# Altium PCB B218.PcbDoc
Units mm, origin at the board's own origin, x right, y up, seen from the top; angles counter-clockwise.
Board outline 40 x 22 mm, 4 copper layers (Top Copper, Signal Layer 1, Signal Layer 2, Bottom Copper), stack 1.57 mm thick; 18 components, 21 nets, 115 pads, 224 vias.
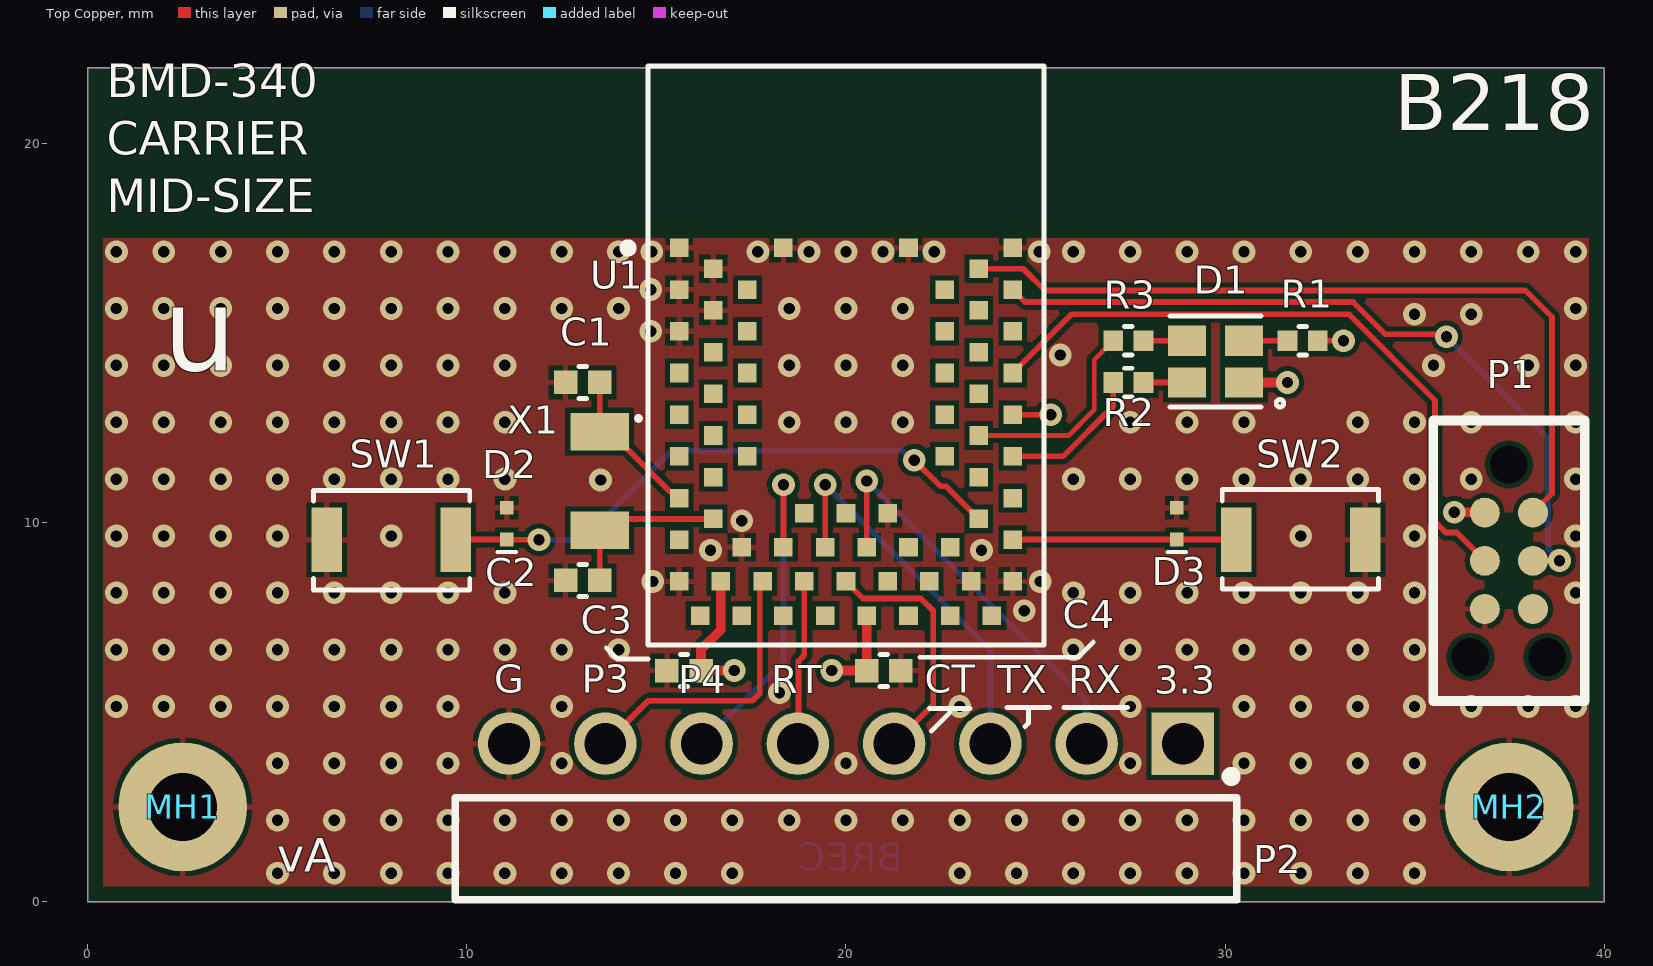
[diagram p0: Top Copper view]
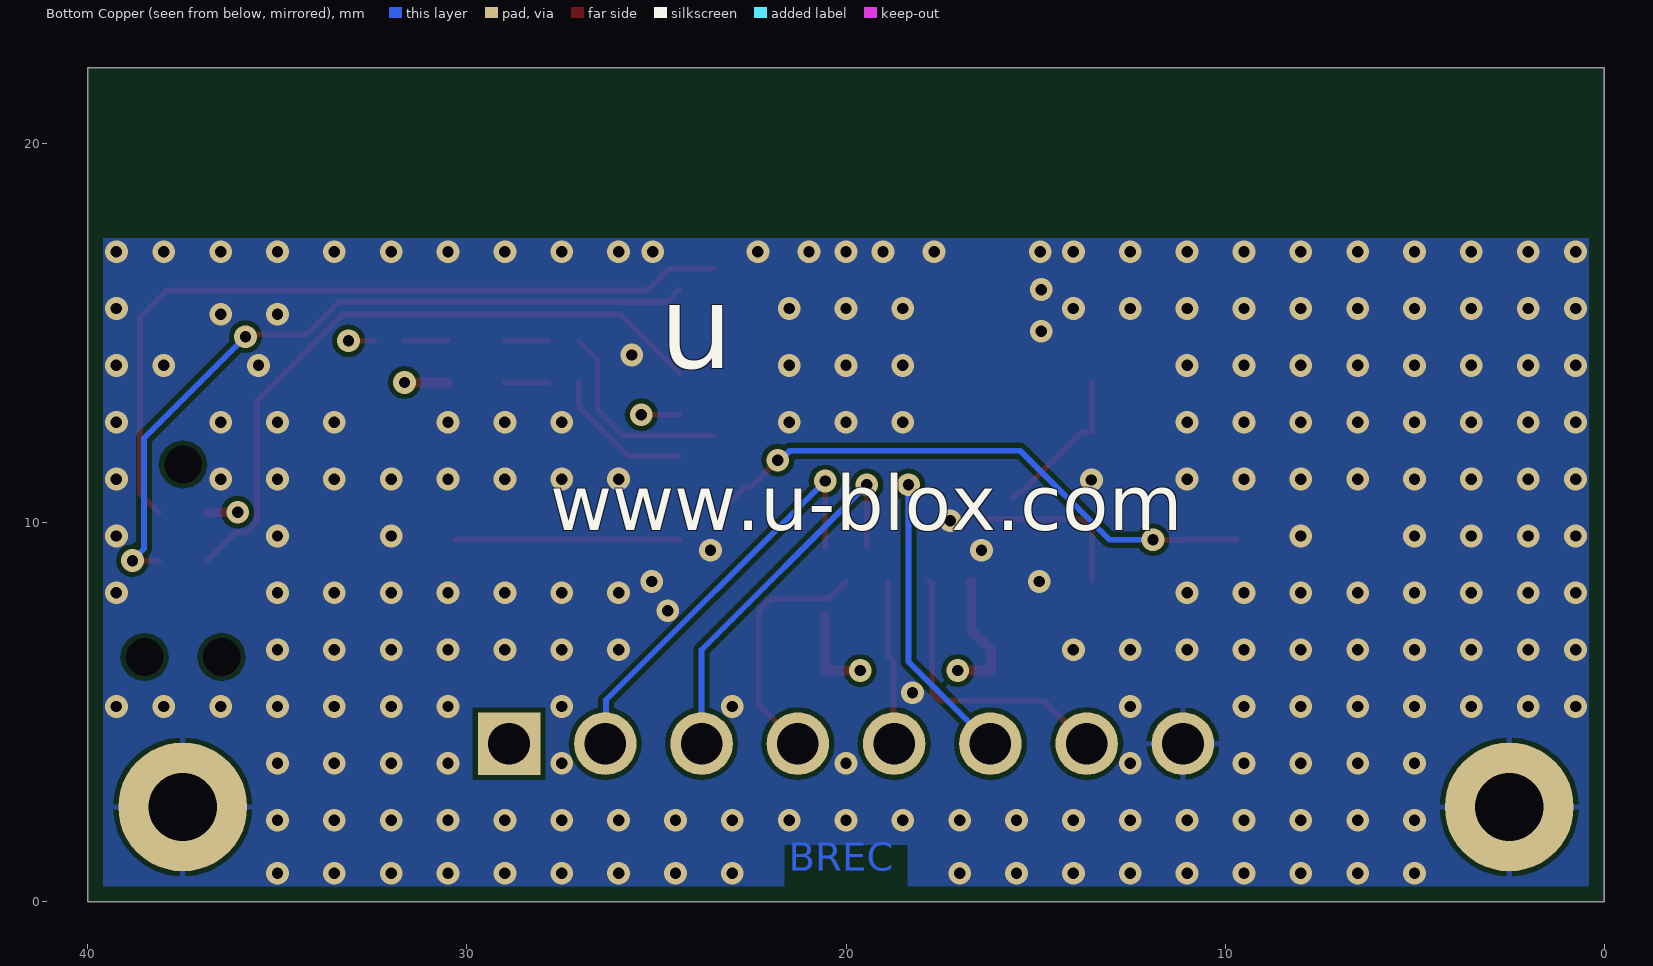
[diagram p1: Bottom Copper view, seen from below]
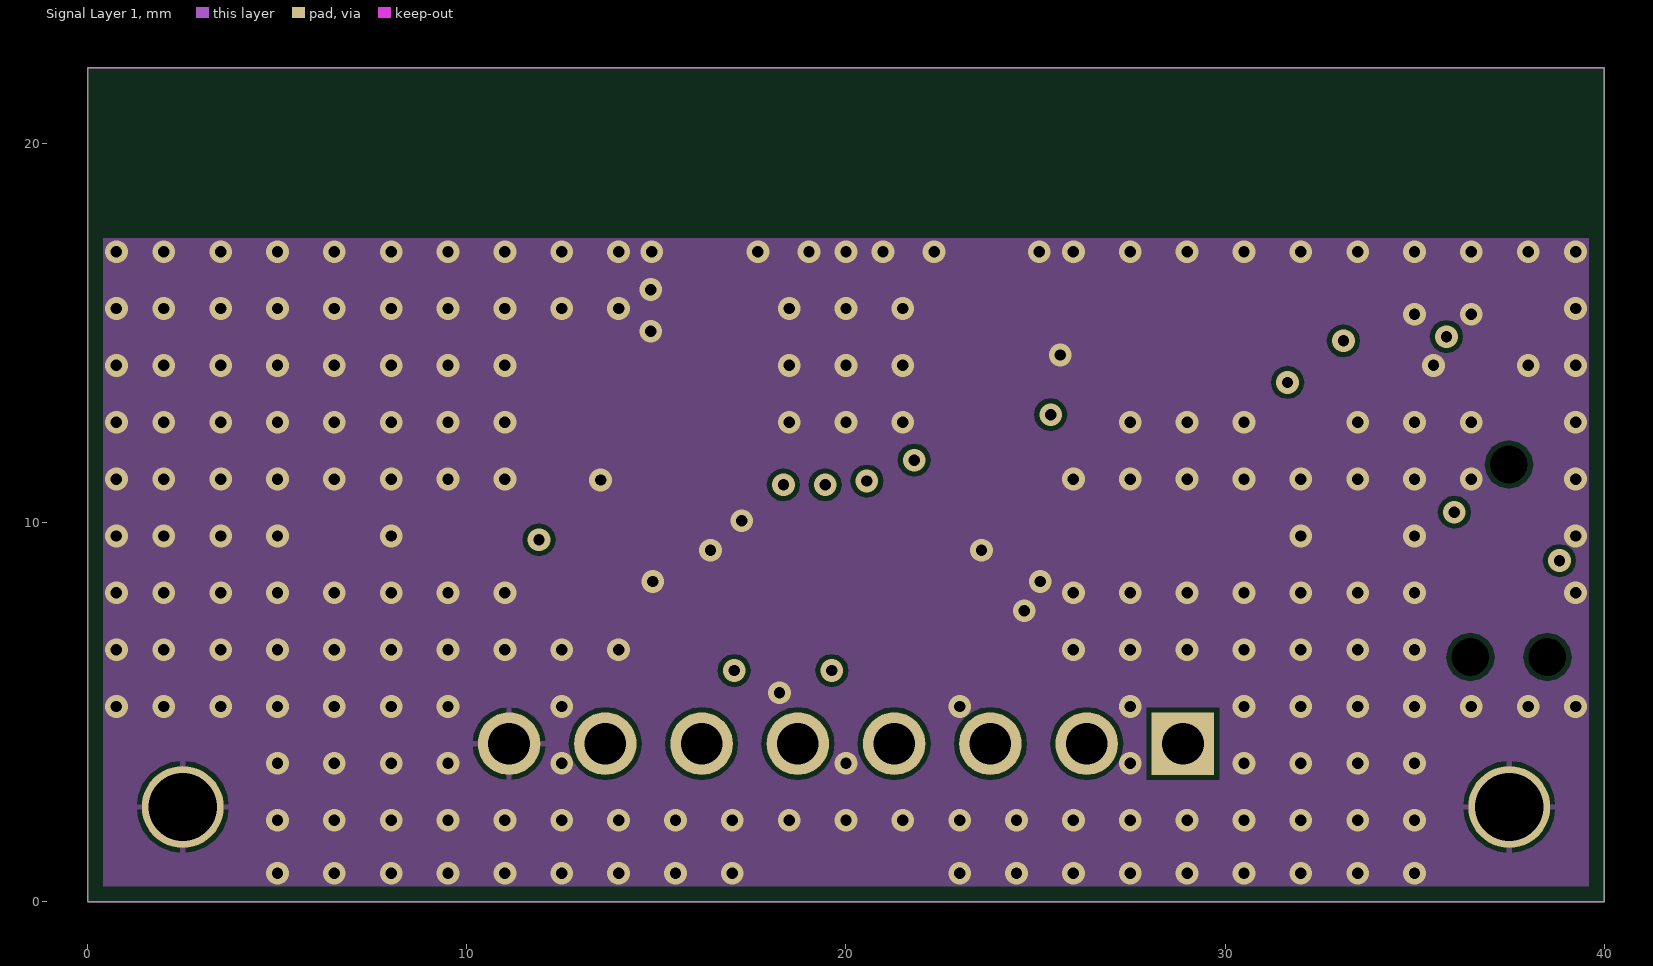
[diagram p2: Signal Layer 1]
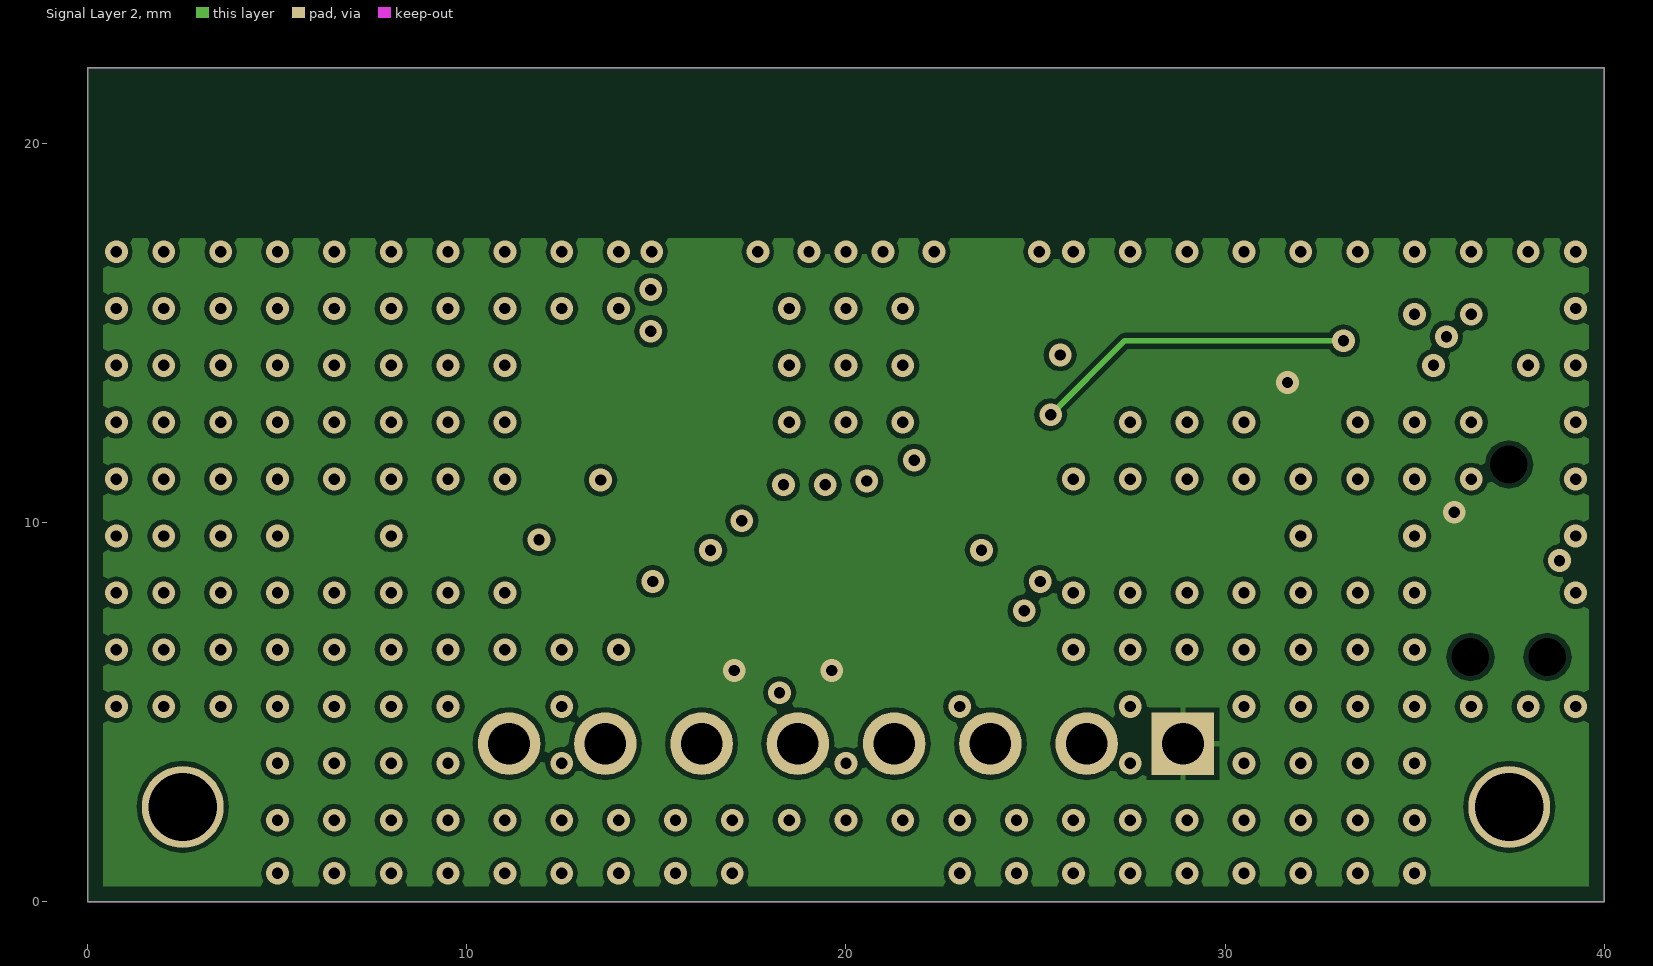
[diagram p3: Signal Layer 2]

## Layer stack, top to bottom
Top Mask: solder mask 0.015, Solder Resist, Dk 3.8
Top Copper: signal copper 0.035
Dielectric 1: prepreg 0.1, 2313, Dk 4.05
Signal Layer 1: signal copper 0.0175
Core: core 1.265, FR-4, Dk 4.5
Signal Layer 2: signal copper 0.0175
Dielectric 2: prepreg 0.1, 2313, Dk 4.05
Bottom Copper: signal copper 0.035
Bottom Mask: solder mask 0.015, Solder Resist, Dk 3.8

## Board outline
0,22 40,22 40,0 0,0

## Design rules (kind name [scope] priority, off if disabled: settings)
BoardOutlineClearance [All] p1: gap=0.4 ignorepadtopadclearanceinfootprint=FALSE
Clearance "Stitching GND" [IsStitchingVia and InNet('GND') vs (IsVia and (Not IsStitchingVia)) Or IsPad] p1: gap=0.127 ignorepadtopadclearanceinfootprint=TRUE
Clearance Clearance_Poly [InPolygon vs OnLayer('Keep-Out Layer') OR (OnLayer('Multi-Layer') AND IsPad  AND Not(PadIsPlated))] p2: gap=0.127 ignorepadtopadclearanceinfootprint=TRUE
Clearance [All] p3: gap=0.127 ignorepadtopadclearanceinfootprint=FALSE except(0: Arc-Text Arc-Hole Track-Text Track-Hole SMDPad-Text SMDPad-Hole THPad-Text THPad-Hole Via-Text Via-Hole Fill-Text Fill-Hole Poly-Text Poly-Hole Region-Text Region-Hole Text-Text Text-Hole)
ComponentClearance [All] p1: gap=0.127 collisioncheckmode=3 verticalgap=0.254 showdistances=FALSE
DiffPairsRouting .14 [All] p1: maxlimit=0.254 minlimit=0.1 mostfreqgap=0.254 toplayer_maxgap=0.1 toplayer_prefgap=0.1 toplayer_minwidth=0.1 toplayer_maxwidth=0.1 toplayer_prefwidth=0.1 midlayer1_mingap=0.254 midlayer1_minwidth=0.381 midlayer1_maxwidth=0.381 midlayer1_prefwidth=0.381 midlayer2_mingap=0.254 midlayer2_minwidth=0.381 midlayer2_maxwidth=0.381 midlayer2_prefwidth=0.381 bottomlayer_maxgap=0.1 bottomlayer_prefgap=0.1 bottomlayer_minwidth=0.1 bottomlayer_maxwidth=0.1 bottomlayer_prefwidth=0.1 maxuncoupledlength=12.7
Height [All] p1: minheight=0 maxheight=25.4 prefheight=2.54
HoleSize [All] p1: absolutevalues=TRUE maxlimit=2540 minlimit=0.127 maxpercent=80.000 minpercent=20.000
HoleToHoleClearance [All] p1: gap=0.152 allowstackedmicrovias=TRUE
MinimumSolderMaskSliver [All] p1: minsoldermaskwidth=0.025
PlaneClearance [InPoly] p1: clearance=0.254
PlaneConnect [All] p1: pad.planeconnectstyle=Relief pad.reliefexpansion=0.508 pad.reliefentries=4 pad.reliefconductorwidth=0.254 pad.reliefairgap=0.254 via.planeconnectstyle=Direct via.reliefexpansion=0.508 via.reliefentries=4 via.reliefconductorwidth=0.254 via.reliefairgap=0.254
PolygonConnect ThermalVias [IsVia] p1: connectstyle=Direct reliefconductorwidth=0.254 reliefentries=4 polygonreliefangle="90 Angle" airgapwidth=0.254
PolygonConnect "PolygonConnect - Power" [InNetClass('')] p2: connectstyle=Relief reliefconductorwidth=0.254 reliefentries=4 polygonreliefangle="90 Angle" airgapwidth=0.127
PolygonConnect PolygonConnect-BGA [InComponentClass('')] p3: connectstyle=Relief reliefconductorwidth=0.152 reliefentries=4 polygonreliefangle="45 Angle" airgapwidth=0.152
PolygonConnect PolygonConnect-General [All] p4: connectstyle=Relief reliefconductorwidth=0.152 reliefentries=4 polygonreliefangle="90 Angle" airgapwidth=0.127
RoutingLayers [All] p1: top layer_v5=TRUE mid layer 1_v5=FALSE mid layer 2_v5=TRUE bottom layer_v5=TRUE
RoutingVias [All] p1: holewidth=0.3 width=0.6 viastyle="Through Hole" minholewidth=0.2 minwidth=0.5 maxholewidth=7 maxwidth=1
SMDEntry [All] p1 off: side=TRUE corner=TRUE anyangle=TRUE
SilkToBoardRegionClearance [All] p1 off:
SilkToSilkClearance [All] p1 off: silktosilkclearance=0.025
SilkToSolderMaskClearance [IsPad] p1 off: minsilkscreentomaskgap=0 clearancetoexposedcopper=TRUE
SolderMaskExpansion SolderMaskExpansion_via [IsVia] p1: expansion=-0.254 istentingtop=TRUE
SolderMaskExpansion [All] p2: expansion=0.05 istentingtop=FALSE
UnRoutedNet [All] p1: checkbadconnections=TRUE
ViasUnderSMD [All] p1: allowed=FALSE
Width [All] p1: maxlimit=2.54 minlimit=0.127 preferedwidth=0.152 toplayer_maxwidth=0.254 toplayer_prefwidth=0.152 bottomlayer_maxwidth=0.254 bottomlayer_prefwidth=0.152 minimp=50.000000 maximp=50.000000 favimp=50.000000
Width Width_1 [All] p2: maxlimit=0.254 minlimit=0.254 preferedwidth=0.254
17 further rules are at their usual default settings.

## Components (designator, comment, footprint, x,y, rotation, side; value= is the part's Value field where it differs from the comment)
C1 "UBXH01-000411410P" "Cap 0402" 13.05,13.7 r180 top value=10P
C2 "UBXH01-000411410P" "Cap 0402" 13.05,8.475 r180 top value=10P
C3 "UBXH01-2021002100N" "Cap 0402" 15.725,6.1 r180 top value=100N
C4 "UBXH01-2021002100N" "Cap 0402" 21,6.1 r0 top value=100N
D1 "115-00011" 4-PLCC 29.75,14.25 r0 top
D2 "110-00019" SOD-923 11.05,9.975 r90 top
D3 "110-00019" SOD-923 28.725,9.975 r90 top
MH1 "MH_M1.5DNP" MH_M1.5 2.5,2.5 r0 top
MH2 "MH_M1.5DNP" MH_M1.5 37.5,2.5 r0 top
P1 "TC2030-IDC-NLDNP" TC2030-IDC-NL 37.49,11.535 r270 top
P2 "61300811021" 61300811021 20,1.4 r0 top
R1 "180-00031499R" "RES 0402 HD" 32.05,14.8 r180 top value=499R
R2 "180-00098220R" "RES 0402 HD" 27.45,13.7 r0 top value=220R
R3 "180-00098220R" "RES 0402 HD" 27.45,14.8 r0 top value=220R
SW1 "135-00007" B3U-1000P 8,9.55 r180 top
SW2 "135-00007" B3U-1000P 32,9.55 r0 top
U1 "=Value" BMD_LGA68S_1500X1020X190_PCB 20,14.4 r0 top
X1 "100-00005" XTAL_3215 13.5,11.1 r270 top

## Footprints (in the part's own frame and the unit in brackets; to place one, negate y for a bottom-side part, rotate by r counter-clockwise, add the part's x,y. Pads: shape width x height; smd on the part's side, far side on the other; paste and mask are expansions set on the pad)
4-PLCC [mm] "4 Pin Plastic Leaded Chip Carrier, 2mm x 2mm"
  rect 1x0.8 smd: 1(0.75,-0.55) 2(-0.75,-0.55) 3(-0.75,0.55) 4(0.75,0.55)
  silkscreen extent -1.2,-1.2 1.8,1.2, body extent -1.05,-1.05 1.05,1.05, height 1.01
61300811021 [mm]
  rect 1.65x1.65 hole 1.1: 1(8.89,2.77)
  round 1.65 hole 1.1: 2(6.35,2.77) 3(3.81,2.77) 4(1.27,2.77) 5(-1.27,2.77) 6(-3.81,2.77) 7(-6.35,2.77) 8(-8.89,2.77)
  silkscreen extent -10.31,-1.35 10.31,2.03, body extent -10.16,-7.27 10.16,3.09, height 2.58
B3U-1000P [mm] "Button Tactile, SMT 4mm x 2.5mm, height 1.2mm"
  rect 0.8x1.7 smd: 1(-1.7,0) 2(1.7,0)
  silkscreen extent -2.07,-1.3 2.05,1.33, body extent -2,-1.25 2,1.25, height 1.6
BMD_LGA68S_1500X1020X190_PCB [mm] "LGA, 68pin, 1.1mm Pitch, 15mm x 10.2mm"
  rect 0.49x0.49 smd: 1(-4.4,2.85) 2(-3.5,2.3) 3(-4.4,1.75) 4(-3.5,1.2) 5(-4.4,0.65) 6(-3.5,0.1) 7(-4.4,-0.45) 8(-3.5,-1) 9(-4.4,-1.55) 10(-3.5,-2.1) 11(-4.4,-2.65) 12(-3.5,-3.2) 13(-4.4,-3.75) 14(-3.5,-4.3) 15(-4.4,-4.85) 16(-4.4,-5.95) 17(-3.3,-5.95) 18(-2.75,-5.05) 19(-2.2,-5.95) 20(-1.65,-5.05) 21(-1.1,-5.95) 22(-0.55,-5.05) 23(0,-5.95) 24(0.55,-5.05) 25(1.1,-5.95) 26(1.65,-5.05) 27(2.2,-5.95) 28(2.75,-5.05) 29(3.3,-5.95) 30(4.4,-5.95) 31(4.4,-4.85) 32(3.5,-4.3) 33(4.4,-3.75) 34(3.5,-3.2) 35(4.4,-2.65) 36(3.5,-2.1) 37(4.4,-1.55) 38(3.5,-1) 39(4.4,-0.45) 40(3.5,0.1) 41(4.4,0.65) 42(3.5,1.2) 43(4.4,1.75) 44(3.5,2.3) 45(4.4,2.85) 46(1.65,2.85) 47(-1.65,2.85) 48(-2.6,1.75) 49(-2.6,0.65) 50(-2.6,-0.45) 51(-2.6,-1.55) 52(-2.6,-2.65) 53(-1.1,-4.15) 54(0,-4.15) 55(1.1,-4.15) 56(2.6,-2.65) 57(2.6,-1.55) 58(2.6,-0.45) 59(2.6,0.65) 60(2.6,1.75) 61(-3.85,-6.85) 62(-2.75,-6.85) 63(-1.65,-6.85) 64(-0.55,-6.85) 65(0.55,-6.85) 66(1.65,-6.85) 67(2.75,-6.85) 68(3.85,-6.85)
  Multi-Layer pour cut-out: -5.1,3.1 5.1,3.1 5.1,7.5 -5.1,7.5
  silkscreen extent -5.85,-7.63 5.23,7.65, body extent -5.1,-7.5 5.1,7.5, height 1.87
"Cap 0402" [mm] "Chip Capacitor, 2-Leads, Body 1.00x0.50mm, IPC Medium Density"
  rect 0.62x0.62 smd: 1(-0.45,0) 2(0.45,0)
  silkscreen extent -0.1,-0.43 0.1,0.43, body extent -0.55,-0.3 0.55,0.3, height 0.6
MH_M1.5 [mm] "Mounting Hole M1.5 Metric, 3.4mm diameter pad"
  round 3.4 / inner round 2.159 / far side round 3.4 hole 1.8: 1(0,0)
"RES 0402 HD" [mm] "Chip Resistor, 2-Leads, Body 1.05x0.54mm, IPC High Density"
  rect 0.52x0.55 smd: 1(-0.4,0) 2(0.4,0)
  silkscreen extent -0.1,-0.38 0.1,0.38, body extent -0.55,-0.3 0.55,0.3, height 0.4
SOD-923 [mm] "SOD-923, 2-Leads, Body 1.25x2.50mm, IPC High Density,"
  rect 0.36x0.35 smd mask+0.05: 1(-0.42,0) 2(0.42,0)
  silkscreen extent -0.75,-0.25 -0.75,0.25, body extent -0.4,-0.3 0.4,0.3, height 0.4
TC2030-IDC-NL [mm] "Tag-Connect 6-Pin No Legs"
  round 0.9 hole 0.995 unplated: 0(0,0) 0(5.08,-1.016) 0(5.08,1.016)
  round 0.79 smd paste-0.39: 1(1.27,-0.635) 2(1.27,0.635) 3(2.54,-0.635) 4(2.54,0.635) 5(3.81,-0.635) 6(3.81,0.635)
  silkscreen extent -1.16,-2 6.24,2
XTAL_3215 [mm] "XTAL, 2-Leads, Body 1.50x3.20mm"
  rect 1x1.55 smd: 1(-1.3,0) 2(1.3,0)
  silkscreen extent -1.7,0.98 -1.6,1.07, body extent -1.65,-0.8 1.65,0.8, height 0.9

## Part data
C1 C2: library part UBXH01-0004114, "CAP CER COG 0402", Manufacturer="Murata Manufacturing Company, Ltd.", Manufacturer 2=None, Manufacturer P/N=GRM1555C1H100CZ01, Max Voltage=25.0V, Tolerance=5%, Automotive=None, Critical=None, Editor=martin.frauchiger, Env=ROHS, Manufacturer 3=None, Manufacturer P/N 2=None, Manufacturer P/N 3=None, Max Current=None, Max Operating Temp=None, Max Power=None, Mfg P/N Datasheet=None, Mfg P/N Datasheet 2=None, Mfg P/N Datasheet 3=None, Mfg P/N Released=Yes, Mfg P/N Released 2=None, Mfg P/N Released 3=None, Mfg P/N Split=0, Mfg P/N Split 2=None, Mfg P/N Split 3=None, Mfg P/N Status=Obsolete, Mfg P/N Status 2=None, Mfg P/N Status 3=None, Min Operating Temp=None, Part Number=UBXH01-0004114, Part Type=Capacitor, Perferred=PREF, Permitted Use="Volume Products", RefDes=C, Release Data="2005-09-01 15:36:53", Released by=martin.frauchiger, Single Source=None, Size=0x0y, UBX Wiki=https://wiki.u-blox.com/bin/view/Operations/PartDetails?index=5225
C3 C4: library part UBXH01-2021002, "CAP CER X5R 0402", Manufacturer="Samsung Electro-Mechanics", Manufacturer 2=None, Manufacturer P/N=CL05A104KP5NNN, Max Voltage=10.0V, Tolerance=10%, Automotive=None, Critical=None, Editor=roland.rust, Env=GREEN, Manufacturer 3=None, Manufacturer P/N 2=None, Manufacturer P/N 3=None, Max Current=None, Max Operating Temp=None, Max Power=None, Mfg P/N Datasheet=https://wiki.u-blox.com/bin/view/Generic/Docs/DocumentSummary?index=28113, Mfg P/N Datasheet 2=None, Mfg P/N Datasheet 3=None, Mfg P/N Released=Yes, Mfg P/N Released 2=None, Mfg P/N Released 3=None, Mfg P/N Split=0, Mfg P/N Split 2=None, Mfg P/N Split 3=None, Mfg P/N Status=Active, Mfg P/N Status 2=None, Mfg P/N Status 3=None, Min Operating Temp=None, Part Number=UBXH01-2021002, Part Type=Capacitor, Perferred=PREF, Permitted Use="Volume Products", RefDes=C, Release Data="2005-07-22 13:59:44", Released by=roland.rust, Single Source=None, Size=0x0y, UBX Wiki=https://wiki.u-blox.com/bin/view/Operations/PartDetails?index=5759
D1: "LED, RGB Diffused SMT, PLCC4 4 Pin", Color=RGB, Current="20mA Red, 10mA Green, 10mA, Blue", Manufacturer="Cree, Inc.", Manufacturer P/N=CLMVB-FKA-CFHEHLCBB7a363, MFG Package=PLCC4, Package Type=Custom, Part Name="LED RGB SMT 2mm x 2mm", Supplier Part Number 1=941-CLMVBFKACFHEHLCB, Voltage=5V, Arena Link=https://app.bom.com/a/UCV39GZGZIHY581D?v=spec.summary, Body Size="2.0mm x 2.0mm", Component Mounting Type=SMT, Height=1mm, Item_Phase=Production, Mounting Type=Vertical, Number of Circuits=3, Part Number=115-00011, Part_Type=LED, Pins=4, Revision=0A, Supplier 1=Mouser, Use in new designs=Yes, Vf="2V Red, 3V Green, 3V Blue"
D2 D3: "Diode, ESD9B, 3.3V, ST5G, SOD-923", Manufacturer="ON Semiconductor", Manufacturer P/N=ESD9B3.3ST5G, MFG Package=SOD-923, Package Type=SOD, Part Name="Diode TVS 3.3V SOD-923", Voltage=3.3V, Arena Link=https://app.bom.com/a/4M5DJQ9Q9SR7DV4H?v=spec.summary, Body Size="0.8mm x 0.6mm", Component Mounting Type=SMT, Diode Type=TVS, Height=0.4mm, Item_Phase=Production, Part Number=110-00019, Part_Type=Diode, Pins=2, Revision=0A, Supplier 1=Arrow, Supplier Part Number 1=ESD9B3.3ST5G, Use in new designs=Yes
MH1 MH2: library part MH_M1.5, "1.5M screw mounting hole, plated", Added By="Jeremy D", Added Date=7/9/2015, DNP=DNP, Height=0mm, Part Number=MH_M1.5, Size="3.4mm x 3.4mm", Type="Mounting Hole"
P1: library part TC2030-IDC-NL, "CON PADS FOR CBL PLUG-OF-NAILS 6-PIN NO LEGS", Manufacturer="TAG Connect", Added By="Paul B", Added Date=4/22/2015, DNP=DNP, Height=0, Manufacturer P/N=TC2030-IDC-NL, Part Number=TC2030-IDC-NL, Size="6.731mm x 12.446mm"
P2: library part CMP-1502-01075-1, "THT Angled Pin Header WR-PHD, Pitch 2.54 mm, Single Row, 8 pins", Contact Resistance=20mOhm, Manufacturer="Wurth Electronics", Operating Temperature=-40to105degC, Rated Current=3A, Withstanding Voltage=500VAC, Working Voltage=250VAC, Datasheet URL=https://katalog.we-online.de/em/datasheet/6130xx11021.pdf, Gender=Male, Manufacturer Part Number=61300811021, Manufacturer URL=http://www.we-online.de, Mounting Technology=THT, Orientation=Angled, Package Reference=61300811021, Packaging=Bag, Part Number=61300811021, Pin Number=8, Pitch=2.54mm, Publisher=WurthElektronik, Row Number=Single
R1: library part 180-00031, "Resistor, 499ohm, 1%, 1/16W, 0402", Manufacturer="Rohm Semiconductor", Manufacturer 2="Samsung Electro-Mechanics America, Inc", Manufacturer P/N=MCR01MRTF4990, Manufacturer P/N 2=RC1005F4990CS, Part Name="RES SMD 499 OHM 1% 1/16W 0402", Power=1/16W, Supplier Part Number 1=RHM499CDCT-ND, Tolerance="+/- 1%", Alternate Footprint Ref="RES 0402", Arena Link=https://app.bom.com/a/Q8RZ5CVCVEDU1SS5?v=spec.summary, Component Mounting Type=SMT, Height=0.4mm, Item_Phase=Production, Part Number=180-00031, Part_Type=Resistor, Pins=2, Revision=0D, Size=0402, Supplier 1=Digi-Key, Supplier 2=Digi-Key, Supplier Part Number 2=1276-3992-1-ND, Use in new designs=Yes
R2 R3: library part 180-00098, "Resistor, 220ohm, 5%, 1/16W, 0402.", Manufacturer="Panasonic Electronic Components", Manufacturer 2="Samsung Electro-Mechanics America, Inc", Manufacturer P/N=ERJ-2GEJ221X, Manufacturer P/N 2=RC1005J221CS, Part Name="RES SMD 220 OHM 5% 1/16W 0402", Power=1/16W, Supplier Part Number 1=P220JCT-ND, Tolerance="+/- 5%", Alternate Footprint Ref="RES 0402", Arena Link=https://app.bom.com/a/8Q9HNUDUDWVBJC30?v=spec.summary, Component Mounting Type=SMT, Height=0.4mm, Item_Phase=Production, Part Number=180-00098, Part_Type=Resistor, Pins=2, Revision=0C, Size=0402, Supplier 1=Digi-Key, Supplier 2=Digi-Key, Supplier Part Number 2=1276-4360-1-ND, Use in new designs=Yes
SW1 SW2: "Button, Momentary SPST-NO, 0.05A, 12V, 3mm x 2.5mm", Current=50mA, Manufacturer="Omron Electronics Inc-EMC Div", Manufacturer P/N=B3U-1000P, Part Name="SWITCH TACTILE SPST-NO 0.05A 12V", Supplier Part Number 1=SW1020CT-ND, Voltage=12VDC, Arena Link=https://app.bom.com/a/TBU28FYFYHGV5FQ0?v=spec.summary, Body Size="3mm x 2.5mm", Component Mounting Type=SMT, Height=1.2mm, Item_Phase=Production, Part Number=135-00007, Part_Type=Button, Pins=2, Revision=0A, Supplier 1=Digi-Key, Switch/Button Circuit=SPST, Switch/Button Function=Off-Mom, Use in new designs=Yes
U1: library part BMD-340, "u-blox BMD-340 Bluetooth 5 LE, 802.15.4 module", Manufacturer=u-blox, Manufacturer P/N=BMD-340-A-R, Body Size="15mm x 10.2mm", Height=1.9mm, Internal Antenna=PCB, Part Number=BMD-340, Protocol="BT 5 LE, 802.15.4, 2.4GHz Proprietary"
X1: "XTAL, 2Pin, 32.768kHz, 7pF 20ppm", Frequency=32.768kHz, Frequency Tolerance=20ppm, Manufacturer=Epson, Manufacturer 2="AVX Corporation", Manufacturer P/N="FC-135 32.7680KA-AG3", Manufacturer P/N 2=ST3215SB32768C0HPWBB, MFG Package=2-SMD, Part Name="XTAL 32.768kHz 7pF 20ppm 3215", Supplier Part Number 1=SER4086CT-ND, Arena Link=https://app.bom.com/a/L3MU07Q7Q98O5PC8?v=spec.summary, Body Size="3.2mm x 1.5mm", CL=7pF, Component Mounting Type=SMT, Height=0.9mm, Item_Phase=Production, Part Number=100-00005, Part_Type=Crystal/Oscillator, Pins=2, Revision=0C, Supplier 1=Digi-Key, Supplier 2=Digi-Key, Supplier Part Number 2=1253-1113-1-ND, Use in new designs=Yes

## Via types
v1: diameter 0.6, hole 0.3, Top Copper to Bottom Copper, tented both sides, 224 vias

## Nets (pads, with @x,y where several pads share a name; then routed paths per layer and width w, separated by ;. In a path a pad name is that pad's centre, name@x,y a point inside that pad or via, vN(x,y) a via of type N, cw(c..) or ccw(c..) an arc to the next point about the centre after c; other vN are vias at no path point)
3V3: C3.1 C4.1 D1.1 P1.1 P2.1 U1.17 U1.65 | length 7.8
  Top Copper w0.254: U1.17@16.725,8.425 U1.17 16.7,7.175 16.175,6.65 C3.1 v1(17.05,6.1) ; v1(19.625,6.1) C4.1 U1.65 ; D1.1 v1(31.65,13.7) ; v1(36.052,10.277) 36.054,10.279 36.841,10.279 P1.1
BLUE: R2.1 U1.35 | length 3.8
  Top Copper w0.152: U1.35 25.725,11.75 27.05,13.075 R2.1
BUTTON_1: D2.1 SW1.1 U1.32 | length 15.5
  Top Copper w0.152: SW1.1 9.705,9.555 D2.1 11.055,9.55 v1(11.9,9.55) ; v1(21.8,11.65) 22.49,10.96 22.64,10.96 U1.32
  Bottom Copper w0.152: v1(11.9,9.55) 13.05,9.55 15.4,11.9 21.487,11.9 21.737,11.65 v1(21.8,11.65)
BUTTON_2: D3.1 SW2.1 U1.31 | length 5.9
  Top Copper w0.152: U1.31 24.405,9.555 D3.1 30.295,9.555 SW2.1
CTS: P2.4 U1.23 | length 6.6
  Top Copper w0.152: U1.23 20.448,8.002 21.975,8.002 22.302,7.675 22.302,5.202 P2.4
GND: C1.2 C2.2 C3.2 C4.2 D2.2 D3.2 MH1.1 MH2.1 P1.5 P2.8 SW1.2 SW2.2 U1.1 U1.2 U1.3 U1.4 U1.5 U1.16 U1.18 U1.29 U1.30 U1.45 U1.46 U1.47 U1.55
  other v1: 5,0.75 6.5,0.75 8,0.75 9.5,0.75 11,0.75 12.5,0.75 14,0.75 15.5,0.75 17,0.75 23,0.75 24.5,0.75 26,0.75 27.5,0.75 29,0.75 30.5,0.75 32,0.75 33.5,0.75 35,0.75 5,2.15 6.5,2.15 8,2.15 9.5,2.15 11,2.15 12.5,2.15 14,2.15 15.5,2.15 17,2.15 18.5,2.15 20,2.15 21.5,2.15 23,2.15 24.5,2.15 26,2.15 27.5,2.15 29,2.15 30.5,2.15 32,2.15 33.5,2.15 35,2.15 5,3.65 6.5,3.65 8,3.65 9.5,3.65 12.5,3.65 20,3.65 27.5,3.65 30.5,3.65 32,3.65 33.5,3.65 35,3.65 0.75,5.15 2,5.15 3.5,5.15 5,5.15 6.5,5.15 8,5.15 9.5,5.15 12.5,5.15 23,5.15 27.5,5.15 30.5,5.15 32,5.15 33.5,5.15 35,5.15 36.5,5.15 38,5.15 39.25,5.15 18.247,5.516 0.75,6.65 2,6.65 3.5,6.65 5,6.65 6.5,6.65 8,6.65 9.5,6.65 11,6.65 12.5,6.65 14,6.65 26,6.65 27.5,6.65 29,6.65 30.5,6.65 32,6.65 33.5,6.65 35,6.65 24.7,7.675 0.75,8.15 2,8.15 3.5,8.15 5,8.15 6.5,8.15 8,8.15 9.5,8.15 11,8.15 26,8.15 27.5,8.15 29,8.15 30.5,8.15 32,8.15 33.5,8.15 35,8.15 39.25,8.15 14.9,8.45 25.125,8.45 16.425,9.275 23.575,9.275 0.75,9.65 2,9.65 3.5,9.65 5,9.65 8,9.65 32,9.65 35,9.65 39.25,9.65 17.25,10.05 13.525,11.125 0.75,11.15 2,11.15 3.5,11.15 5,11.15 6.5,11.15 8,11.15 9.5,11.15 11,11.15 26,11.15 27.5,11.15 29,11.15 30.5,11.15 32,11.15 33.5,11.15 35,11.15 36.5,11.15 39.25,11.15 0.75,12.65 2,12.65 3.5,12.65 5,12.65 6.5,12.65 8,12.65 9.5,12.65 11,12.65 18.5,12.65 20,12.65 21.5,12.65 27.5,12.65 29,12.65 30.5,12.65 33.5,12.65 35,12.65 36.5,12.65 39.25,12.65 0.75,14.15 2,14.15 3.5,14.15 5,14.15 6.5,14.15 8,14.15 9.5,14.15 11,14.15 18.5,14.15 20,14.15 21.5,14.15 35.5,14.15 38,14.15 39.25,14.15 25.65,14.425 14.85,15.05 35,15.5 36.5,15.5 0.75,15.65 2,15.65 3.5,15.65 5,15.65 6.5,15.65 8,15.65 9.5,15.65 11,15.65 12.5,15.65 14,15.65 18.5,15.65 20,15.65 21.5,15.65 39.25,15.65 14.85,16.15 0.75,17.15 2,17.15 3.5,17.15 5,17.15 6.5,17.15 8,17.15 9.5,17.15 11,17.15 12.5,17.15 14,17.15 14.874,17.146 17.675,17.15 19.024,17.146 20,17.15 20.975,17.15 22.325,17.15 25.1,17.15 26,17.15 27.5,17.15 29,17.15 30.5,17.15 32,17.15 33.5,17.15 35,17.15 36.5,17.15 38,17.15 39.25,17.15
GREEN: R3.1 U1.36 | length 5.4
  Top Copper w0.127: U1.36 25.875,12.3 26.55,12.975 26.55,14.3 26.839,14.589 26.854,14.589 27.05,14.785 R3.1
LFCLK1: C2.1 U1.14 X1.2 | length 4.4
  Top Copper w0.152: C2.1 X1.2 13.8,10.1 U1.14
LFCLK2: C1.1 U1.13 X1.1 | length 4.1
  Top Copper w0.152: C1.1 X1.1 13.775,12.4 15.356,10.819 15.431,10.819 U1.13
NetD1_2: D1.2 R2.2 | length 1.1
  Top Copper w0.152: R2.2 D1.2
NetD1_3: D1.3 R3.2 | length 1.1
  Top Copper w0.152: R3.2 D1.3
NetD1_4: D1.4 R1.2 | length 1.2
  Top Copper w0.152: D1.4 R1.2
nRESET: P1.3 U1.39 | length 17.7
  Top Copper w0.152: U1.39 25.95,15.5 33.27,15.5 35.543,13.227 35.543,10.025 35.825,9.743 36.112,9.743 P1.3@36.855,9
P0.03: P2.7 U1.19 | length 7.6
  Top Copper w0.152: P2.7 14.78,5.3 17.525,5.3 17.723,5.498 17.723,8.373 U1.19
P0.04: P2.6 U1.20 | length 9.4
  Top Copper w0.152: U1.20 v1(18.35,11)
  Bottom Copper w0.152: P2.6 18.35,6.33 v1(18.35,11)
RED: R1.1 U1.37 | length 10.2
  Top Copper w0.152: U1.37 v1(25.4,12.85) ; R1.1 v1(33.125,14.8)
  Signal Layer 2 w0.152: v1(25.4,12.85) 27.35,14.8 v1(33.125,14.8)
RTS: P2.5 U1.21 | length 4.4
  Top Copper w0.152: P2.5 18.75,4.19 18.75,6.35 18.9,6.5 U1.21
RXD: P2.2 U1.24 | length 11.1
  Top Copper w0.152: U1.24 v1(20.55,11.1)
  Bottom Copper w0.152: v1(20.55,11.1) 26.331,5.319 26.331,4.189 P2.2
SWCLK: P1.4 U1.43 | length 19.8
  Top Copper w0.152: U1.43 24.725,15.825 33.375,15.825 34.225,14.975 35.777,14.975 v1(35.843,14.909) ; P1.4 38.128,8.998 38.823,8.998 v1(38.825,9)
  Bottom Copper w0.152: v1(35.843,14.909) 38.525,12.227 38.525,9.313 38.825,9.013 v1(38.825,9)
SWDIO: P1.2 U1.44 | length 21
  Top Copper w0.152: U1.44 24.675,16.7 25.25,16.125 37.925,16.125 38.625,15.425 38.625,10.77 P1.2@38.125,10.27
TXD: P2.3 U1.22 | length 10.3
  Top Copper w0.152: U1.22 v1(19.45,11)
  Bottom Copper w0.152: v1(19.45,11) 23.81,6.64 P2.3
pads on no net: P1.0 P1.6 U1.6 U1.7 U1.8 U1.9 U1.10 U1.11 U1.12 U1.15 U1.25 U1.26 U1.27 U1.28 U1.33 U1.34 U1.38 U1.40 U1.41 U1.42 U1.48 U1.49 U1.50 U1.51 U1.52 U1.53 U1.54 U1.56 U1.57 U1.58 U1.59 U1.60 U1.61 U1.62 U1.63 U1.64 U1.66 U1.67 U1.68

## Polygon pours and split planes (outlines as drawn)
GND on Bottom Copper "GND_L04_P010" (solid, remove dead copper, pour order 10): 40,17.502 0,17.502 0,0 40,0
GND on Signal Layer 1 "NONET_L-01_P-001" (solid, remove dead copper, pour order 12): 0,0 0,17.5 40,17.5 40,0
3V3 on Signal Layer 2 "NONET_L-01_P-001" (solid, remove dead copper, pour order 13): 0,0 0,17.5 40,17.5 40,0
GND on Top Copper "GND_L01_P009" (solid, remove dead copper, pour order 9): 39.999,17.5 -0.001,17.5 -0.001,0 39.999,0

## Keep-outs
Keep-Out Layer:
  the board outline again, w0.025

## Other copper
Top Copper:
  pour cut-out: 37.225,10.275 37.75,10.275 38.125,9.9 38.125,8.075 37.775,7.725 37.2,7.725 36.855,8.07 36.855,9.905 36.925,9.975
Bottom Copper:
  pour cut-out: 18.375,0.4 18.375,1.5 21.625,1.5 21.625,0.4
  text "BREC" at 21.512,0.564 h1.27

## Silkscreen, mask and mechanical layers (free items; w line width, h text height)
Top Overlay:
  lines w0.127: 13.675,6.7 13.975,6.4 14.775,6.4 ; 21.95,6.45 26.125,6.45 26.525,6.85 ; 22.2,5.1 23.275,5.1 ; 22.25,4.5 22.737,4.987 22.737,5.1 ; 24.25,5.125 25.375,5.125 ; 24.725,4.625 24.813,4.713 24.813,5.125 ; 25.75,5.125 27.425,5.125
  text "B218" at 34.46,19.867 h2.54
  text "BMD-340 / CARRIER / MID-SIZE" at 0.5,17.9 h1.52
  text "u" at 1.989,13.279 h3.81
  text "G" at 10.724,5.264 h1.27
  text "P3" at 13.026,5.264 h1.27
  text "CT" at 22.084,5.264 h1.27
  text "P4" at 15.577,5.25 h1.27
  text "RT" at 18.025,5.25 h1.27
  text "TX" at 23.992,5.25 h1.27
  text "RX" at 25.861,5.25 h1.27
  text "3.3" at 28.136,5.239 h1.27
  text "vA" at 5,0.5 h1.52
Bottom Overlay:
  text "u" at 24.911,13.348 h3.81
  text "www.u-blox.com" at 27.806,9.309 h2.5
Route Tool Path:
  lines w0.127: 0,0 0,22 ; 0,0 40,0 40,22 0,22 ; 0,0 0,22